# EAGLE board witch-dekatron1 (EAGLE 6.4)
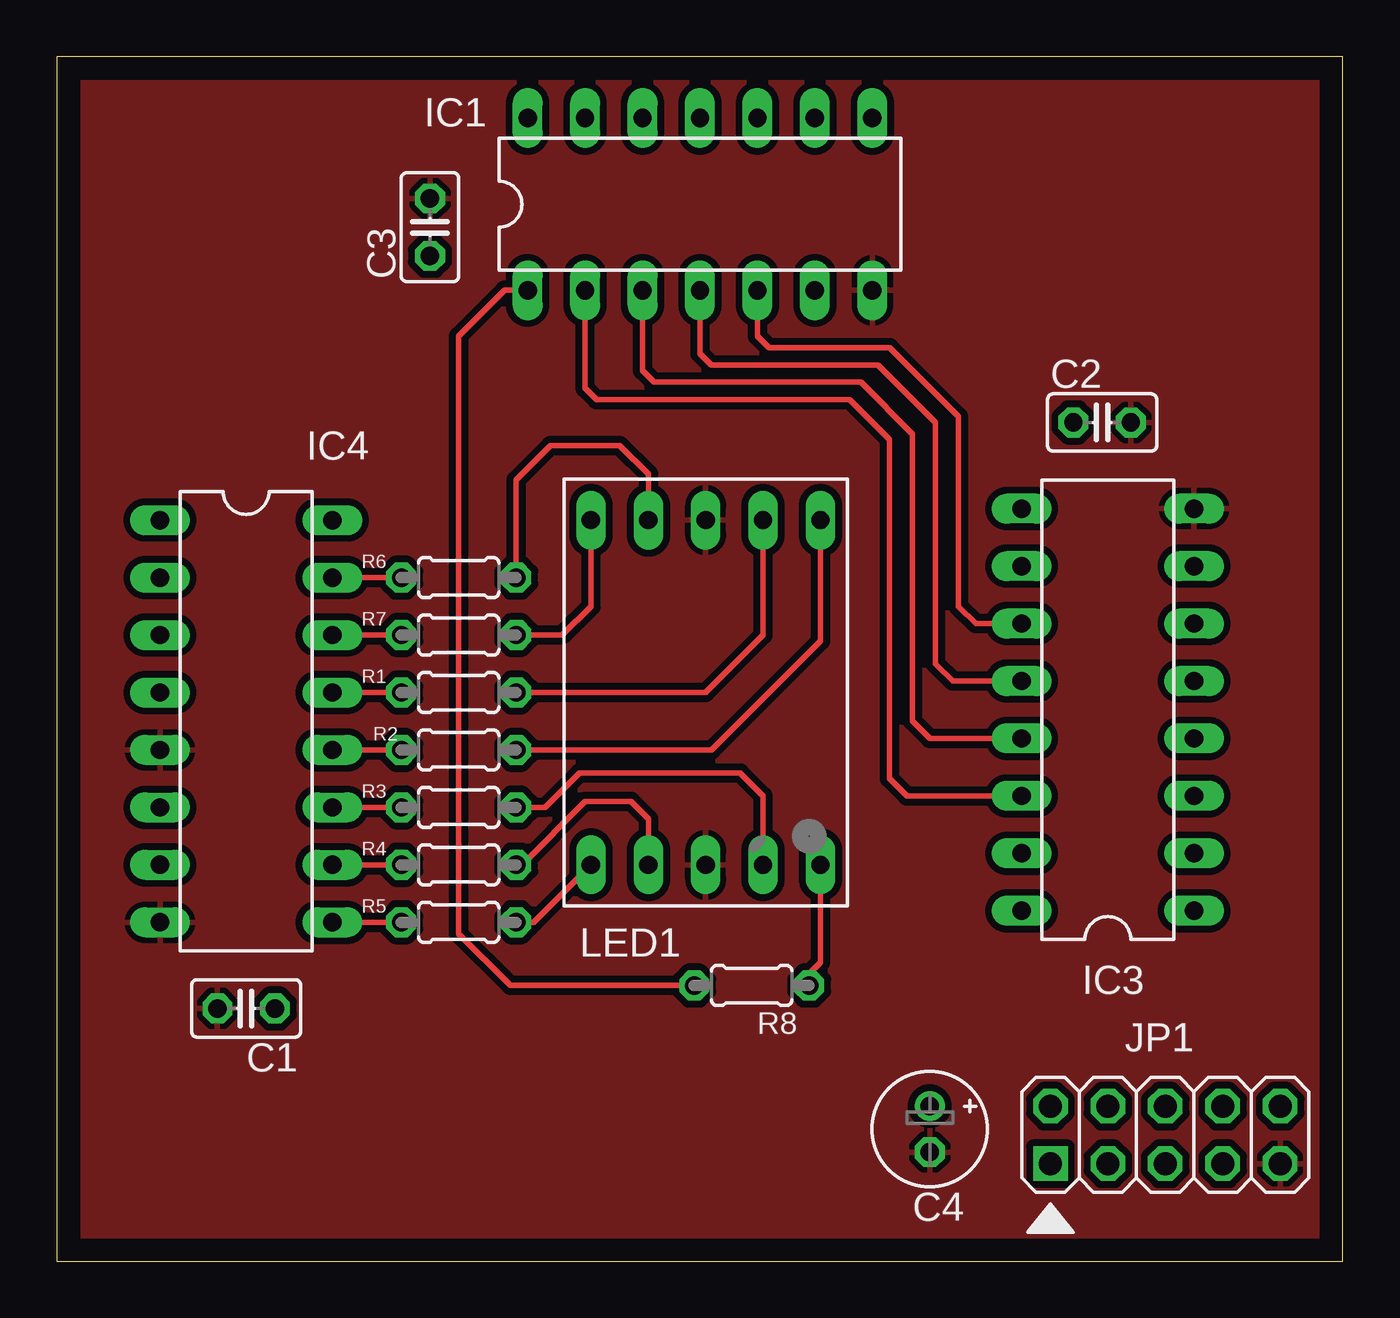
[diagram p0: board, top side]
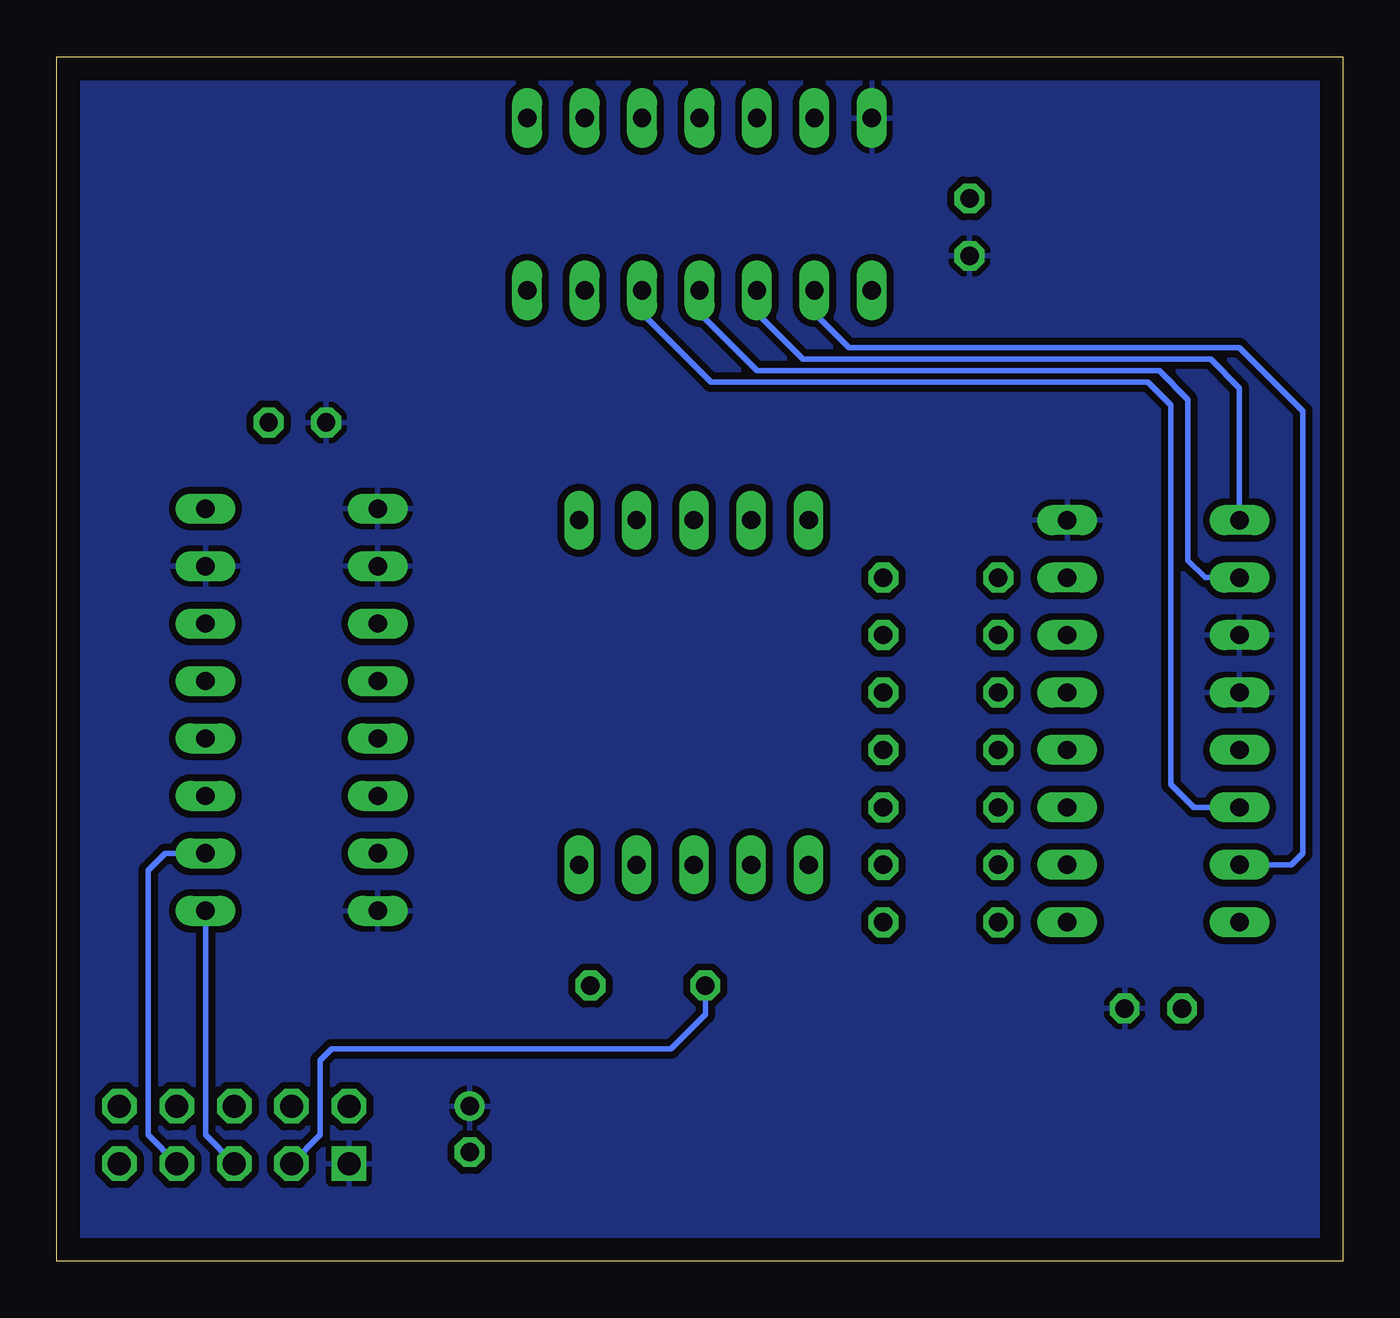
[diagram p1: board, bottom side, seen from below]

Size 56.88 x 53.26 mm. Coordinates in mm from the lower left corner, seen from the top.
Outline: 0,0 56.88,0 56.88,53.26 0,53.26 0,0
Copper layers (1*16): Top 0.035mm / dielectric 1.5mm / Bottom 0.035mm
Design rules "default": minimum track width 10mil, minimum drill 24mil, track to track 8mil, track to pad 8mil, pad to pad 8mil, via to via 8mil, smd to smd 8mil, copper to edge 40mil, drill to drill 8mil, minimum pad ring 10mil, minimum via ring 8mil, stop-mask expansion 4mil, vias tented up to drill 0mil, thermal gap 10mil

## Footprints (pad centres in the part's own frame; a part is rotated, then mirrored left to right if it is on the bottom)
C025-025X050 = drill 0.813 octagon: 1 -1.27,0; 2 1.27,0
E2-5 = drill 0.813 pad 1.27: + -1.016,0 | drill 0.813 pad 1.27 octagon: - 1.016,0
DIL14 = drill 0.813 long: 1 -7.62,-3.81; 2 -5.08,-3.81; 3 -2.54,-3.81; 4 0,-3.81; 5 2.54,-3.81; 6 5.08,-3.81; 7 7.62,-3.81; 8 7.62,3.81; 9 5.08,3.81; 10 2.54,3.81; 11 0,3.81; 12 -2.54,3.81; 13 -5.08,3.81; 14 -7.62,3.81
DIL16 = drill 0.813 long: 1 -8.89,-3.81; 2 -6.35,-3.81; 3 -3.81,-3.81; 4 -1.27,-3.81; 5 1.27,-3.81; 6 3.81,-3.81; 7 6.35,-3.81; 8 8.89,-3.81; 9 8.89,3.81; 10 6.35,3.81; 11 3.81,3.81; 12 1.27,3.81; 13 -1.27,3.81; 14 -3.81,3.81; 15 -6.35,3.81; 16 -8.89,3.81
2X05 = drill 1.016 square: 1 -5.08,-1.27 | drill 1.016 octagon: 2 -5.08,1.27; 3 -2.54,-1.27; 4 -2.54,1.27; 5 0,-1.27; 6 0,1.27; 7 2.54,-1.27; 8 2.54,1.27; 9 5.08,-1.27; 10 5.08,1.27
SA56-11 = drill 0.8 long: 1 -5.08,-7.62; 2 -2.54,-7.62; 3 0,-7.62; 4 2.54,-7.62; 5 5.08,-7.62; 6 5.08,7.62; 7 2.54,7.62; 8 0,7.62; 9 -2.54,7.62; 10 -5.08,7.62
0204/5 = drill 0.813 octagon: 1 -2.54,0; 2 2.54,0

## Placement (x,y rotation side)
C1  [C025-025X050]  8.38,11.18 180 top
C2  [C025-025X050]  46.23,37.08 0 top
C3  [C025-025X050]  16.51,45.72 90 top
C4  [E2-5]  38.61,5.84 270 top
IC1  4002N  [DIL14]  28.45,46.74 0 top
IC3  74HC160N  [DIL16]  46.48,24.38 90 top
IC4  4511N  [DIL16]  8.38,23.88 270 top
JP1  [2X05]  49.02,5.59 0 top
LED1  7-SEG_SA56-11  [SA56-11]  28.7,25.15 0 top
R1  330R  [0204/5]  17.78,25.15 0 top
R2  330R  [0204/5]  17.78,22.61 0 top
R3  330R  [0204/5]  17.78,20.07 0 top
R4  330R  [0204/5]  17.78,17.53 0 top
R5  330R  [0204/5]  17.78,14.99 0 top
R6  330R  [0204/5]  17.78,30.23 0 top
R7  330R  [0204/5]  17.78,27.69 0 top
R8  330R  [0204/5]  30.73,12.19 180 top

## Library data of the parts
C1-C4 R1-R8 = resistor
IC1 = 40xx
IC3 = 74xx-eu
IC4 = 45xx
JP1 = pinhead
LED1 = display-kingbright; OC_FARNELL: unknown; OC_NEWARK: unknown

## Nets
N$1: IC1.1 JP1.3 R8.2
N$2: IC3.1 JP1.5
N$3: IC4.13 R1.1
N$4: IC4.12 R2.1
N$5: IC4.11 R3.1
N$6: IC4.10 R4.1
N$7: IC4.9 R5.1
N$8: IC4.15 R6.1
N$9: IC4.14 R7.1
N$10: IC1.2 IC3.14 IC4.7
N$11: IC1.3 IC3.13 IC4.1
N$12: IC1.4 IC3.12 IC4.2
N$13: IC1.5 IC3.11 IC4.6
N$14: LED1.7 R1.2
N$15: LED1.6 R2.2
N$16: LED1.4 R3.2
N$17: LED1.2 R4.2
N$18: LED1.1 R5.2
N$19: LED1.9 R6.2
N$20: LED1.10 R7.2
N$21: LED1.5 R8.1
N$25: IC3.2 JP1.7
VDD: C1.1 C2.1 C3.1 C4.+ IC1.14 IC3.7 IC3.9 IC3.10 IC3.16 IC4.3 IC4.4 IC4.16 JP1.1
VSS: C1.2 C2.2 C3.2 C4.- IC1.7 IC3.8 IC4.5 IC4.8 JP1.9 LED1.3 LED1.8

## Tracks (layer width: path | path; a pad name or v marks a point on that pad's centre or on a via)
N$1
  Top 0.254: R8.2 20.07,12.19 17.78,14.48 17.78,40.89 19.81,42.93 IC1.1
  Bottom 0.254: R8.2 28.19,10.92 29.72,9.4 44.7,9.4 45.21,8.89 45.21,5.59 JP1.3
N$2
  Bottom 0.254: IC3.1 50.29,5.59 JP1.5
N$3
  Top 0.254: IC4.13 R1.1
N$4
  Top 0.254: IC4.12 R2.1
N$5
  Top 0.254: IC4.11 R3.1
N$6
  Top 0.254: IC4.10 R4.1
N$7
  Top 0.254: IC4.9 R5.1
N$8
  Top 0.254: IC4.15 R6.1
N$9
  Top 0.254: R7.1 IC4.14
N$10
  Top 0.254: IC1.2 23.37,38.61 23.88,38.1 35.05,38.1 36.83,36.32 36.83,21.34 37.59,20.57 IC3.14
  Bottom 0.254: IC4.7 2.29,17.53 1.78,18.03 1.78,37.59 4.57,40.39 21.84,40.39 23.37,41.91 IC1.2
N$11
  Top 0.254: IC1.3 25.91,39.37 26.42,38.86 35.56,38.86 37.85,36.58 37.85,23.88 38.61,23.11 IC3.13
  Bottom 0.254: IC4.1 4.57,38.61 5.84,39.88 23.88,39.88 25.91,41.91 IC1.3
N$12
  Top 0.254: IC1.4 28.45,40.13 28.96,39.62 36.32,39.62 38.86,37.08 38.86,26.42 39.62,25.65 IC3.12
  Bottom 0.254: IC4.2 6.1,30.23 6.86,30.99 6.86,38.1 8.13,39.37 25.91,39.37 28.45,41.91 IC1.4
N$13
  Top 0.254: IC1.5 30.99,40.89 31.5,40.39 36.83,40.39 39.88,37.34 39.88,28.96 40.64,28.19 IC3.11
  Bottom 0.254: IC4.6 6.6,20.07 7.62,21.08 7.62,37.85 8.64,38.86 27.94,38.86 30.99,41.91 IC1.5
N$14
  Top 0.254: R1.2 28.7,25.15 31.24,27.69 LED1.7
N$15
  Top 0.254: R2.2 28.96,22.61 33.78,27.43 LED1.6
N$16
  Top 0.254: R3.2 21.59,20.07 23.11,21.59 30.23,21.59 31.24,20.57 LED1.4
N$17
  Top 0.254: R4.2 20.57,17.53 23.37,20.32 25.4,20.32 26.16,19.56 LED1.2
N$18
  Top 0.254: R5.2 21.08,14.99 LED1.1
N$19
  Top 0.254: R6.2 20.32,34.54 21.84,36.07 24.89,36.07 26.16,34.8 LED1.9
N$20
  Top 0.254: R7.2 22.35,27.69 23.62,28.96 LED1.10
N$21
  Top 0.254: R8.1 33.27,12.7 33.78,13.21 LED1.5
N$25
  Bottom 0.254: IC3.2 52.07,18.03 52.83,17.27 52.83,5.59 JP1.7
VDD
  pour Bottom (isolate 0.305): 0.76,52.58 55.88,52.58 55.88,0.51 0.76,0.51
VSS
  pour Top (isolate 0.305): 0.76,52.58 55.88,52.58 55.88,0.51 0.76,0.51